# Altium PCB DDS_RIKEN_2014.PcbDoc (part 2 of 3)
Units mm, origin at the board's own origin, x right, y up, seen from the top; angles counter-clockwise.
Board outline 224 x 140 mm, 4 copper layers (TopLayer, Ground, Power, BottomLayer); 165 components, 279 nets, 1109 pads, 427 vias.
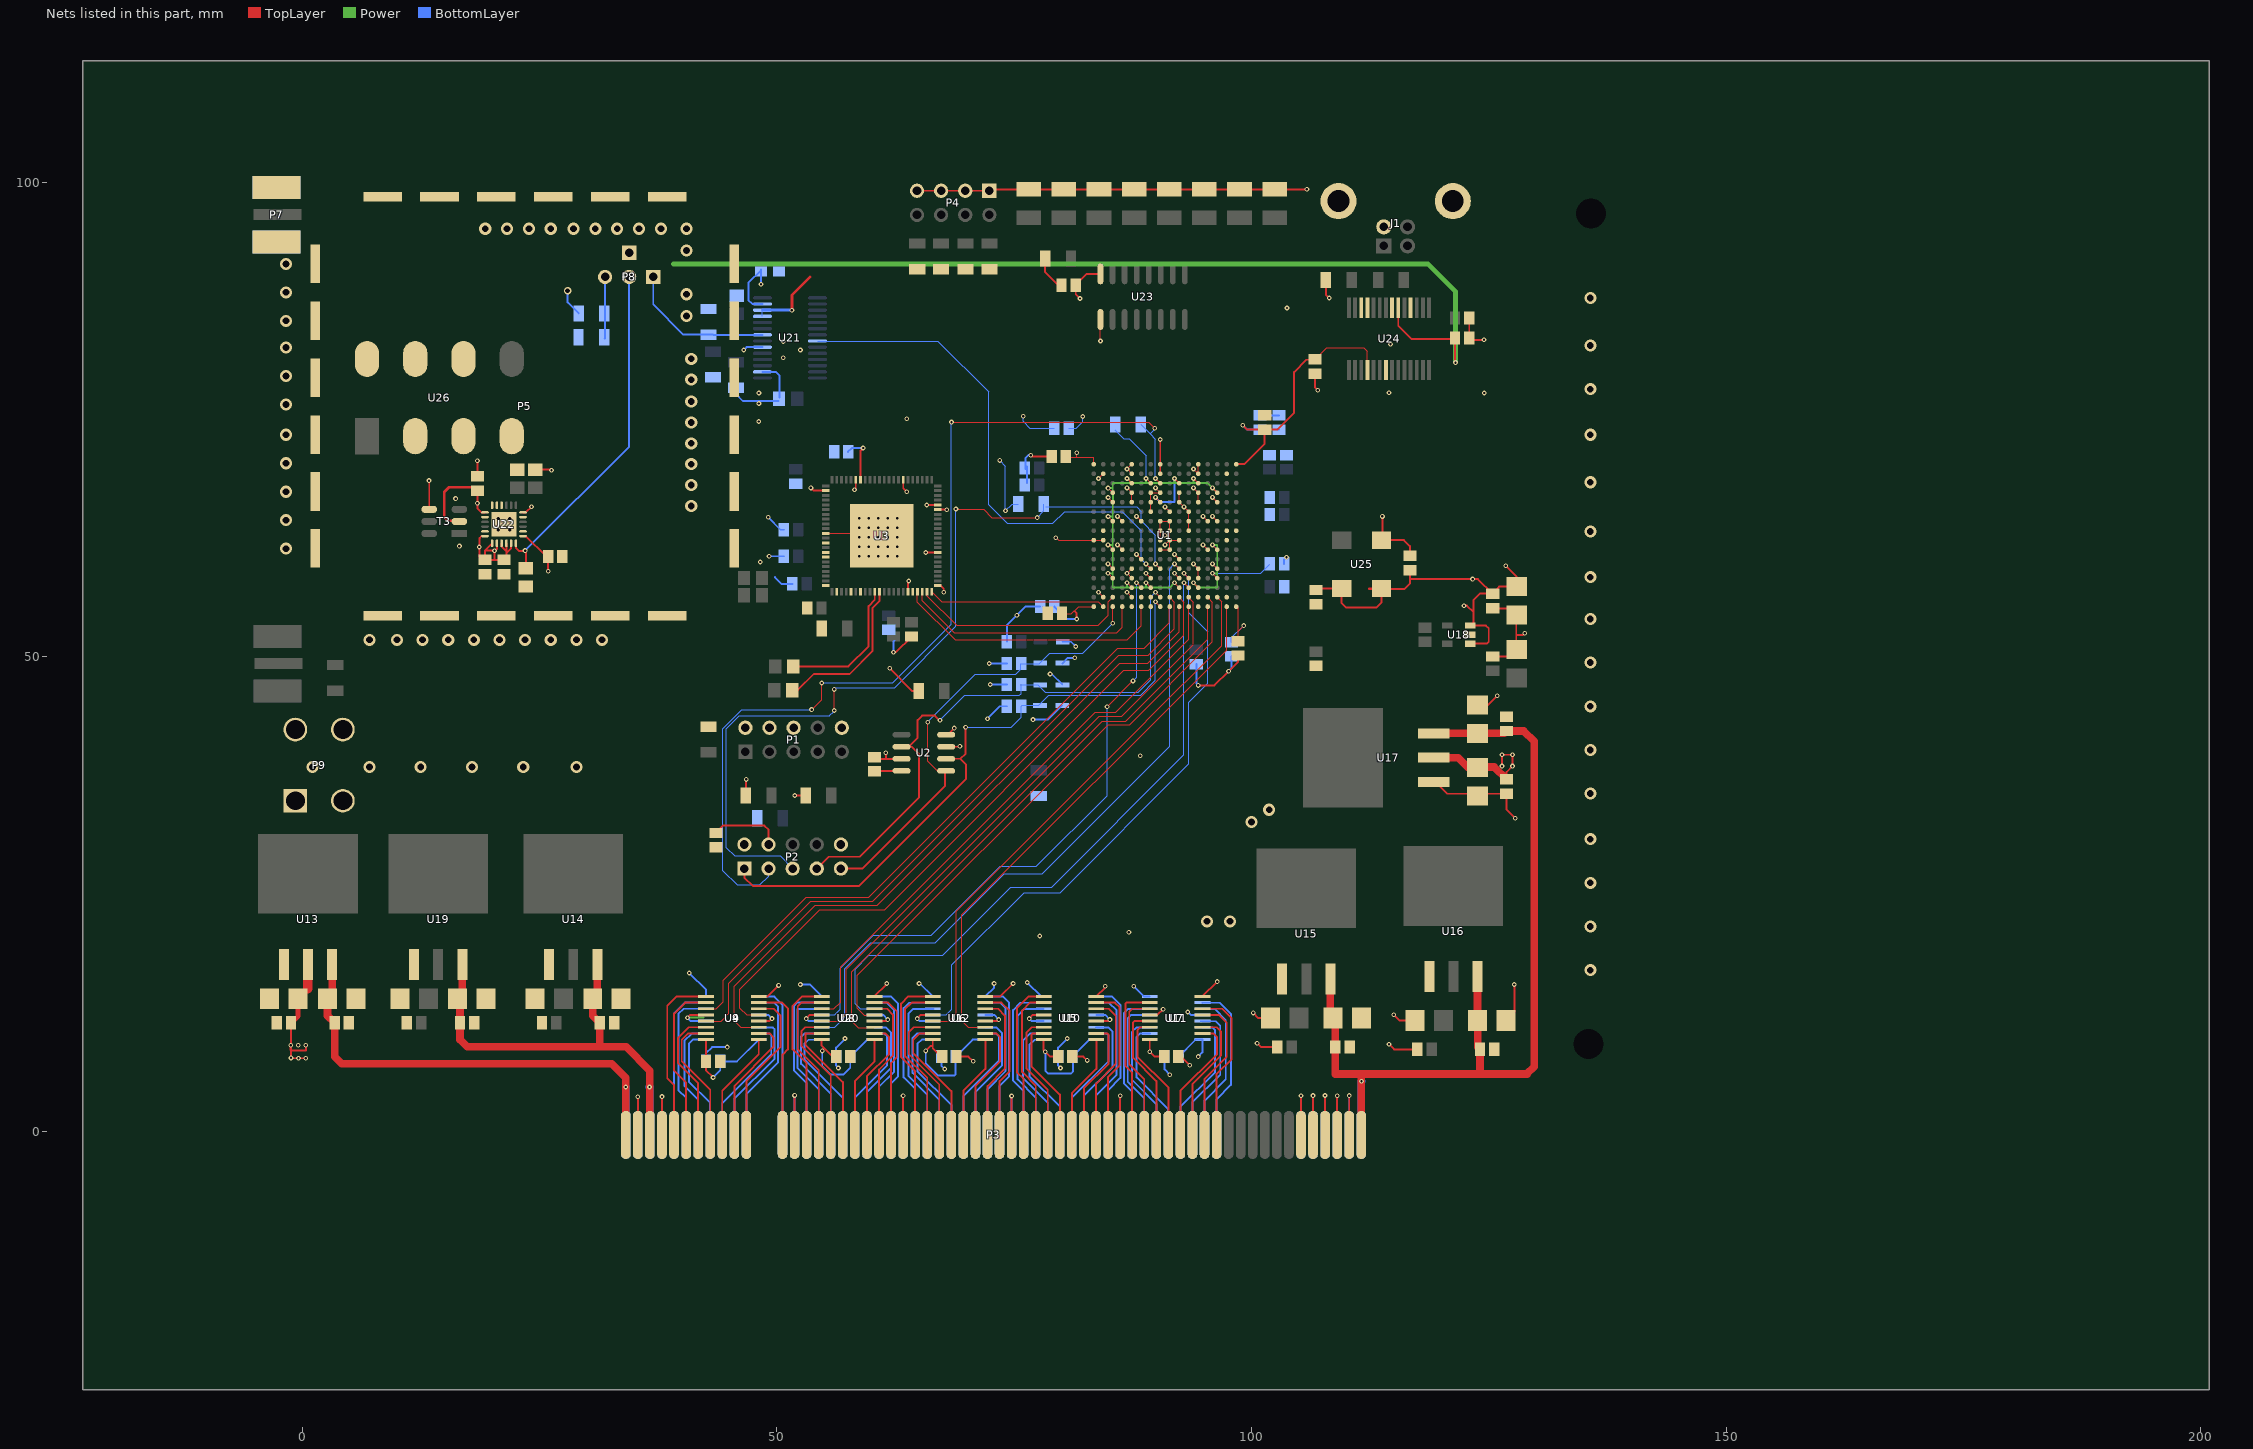
[diagram p4: the nets of this part, all layers, seen from the top]

## Via types
v1: diameter 0.5, hole 0.25, TopLayer to BottomLayer, 240 vias
v2: diameter 0.5, hole 0.25, TopLayer to BottomLayer, tented top, 114 vias
v3: diameter 1.27, hole 0.711, TopLayer to BottomLayer, 68 vias
v4: diameter 0.66, hole 0.33, TopLayer to BottomLayer, tented top, 4 vias
v5: diameter 0.8, hole 0.5, TopLayer to BottomLayer, 1 vias

## Nets (pads, with @x,y where several pads share a name; then routed paths per layer and width w, separated by ;. In a path a pad name is that pad's centre, name@x,y a point inside that pad or via, vN(x,y) a via of type N, cw(c..) or ccw(c..) an arc to the next point about the centre after c; other vN are vias at no path point) (continued)
3.3V_DIG: C1.2 C2.2 C4.2 C5.2 C6.2 C8.2 C9.2 C10.2 C15.1 C16.1 C19.1 C25.1 C30.1 C31.1 C32.1 C33.1 C34.1 C35.1 C36.1 C37.1 C51.1 C54.1 C59.2 C60.2 C67.1 C68.1 C69.1 C80.2 C82.2 C88.1 C91.2 C93.2 D1.1 D2.1 D3.1 D4.1 D5.1 D6.1 D7.1 D8.1 D9.1 D10.1 D11.1 D12.1 P1.4 P1.6 P2.4 P4.1 P4.3 P4.5 P4.7 R1.2 R2.2 R3.2 R5.2 R6.2 U1.A1 U1.A16 U1.C4 U1.C7 U1.C10 U1.C13 U1.E3 U1.E14 U1.G3 U1.G14 U1.H12 U1.K3 U1.K14 U1.M3 U1.M14 U1.P4 U1.P7 U1.P10 U1.P13 U1.T1 U1.T16 U2.3 U2.7 U2.8 U3.16 U3.83 U4.4 U4.12 U4.16 U5.4 U5.12 U5.16 U6.4 U6.12 U6.16 U7.12 U7.16 U8.4 U8.12 U8.16 U9.4 U9.12 U9.16 U10.4 U10.12 U10.16 U11.12 U11.16 U12.4 U12.12 U12.16 U17.2 U18.1 U18.3 U20.4 U20.12 U20.16 U21.27 U23.16 U24.4 U25.1 U25.4 | length 367.9
  TopLayer w0.127: C2.2@79.975,54.525 81.05,54.525 81.8,55.275 U1.A1@83.4,55.275 ; C1.2@80.475,71.025 81.6,71.025 ; v1(81.6,71.475) 81.6,71.025 ; U1.A16@83.4,70.275 83.4,71.025 81.6,71.025 ; v2@84.85,64.82 v2(84.909,64.761) 84.914,64.761 U1.C10@85.4,64.275 ; v2@84.85,67.82 v2(84.909,67.761) 84.914,67.761 U1.C13@85.4,67.275 ; v2(84.9,58.775) U1.C4@85.4,58.275 ; v2(84.9,61.775) U1.C7@85.4,61.275 ; v2(86.9,57.775) U1.E3@87.4,57.275 ; v2(86.9,68.775) U1.E14@87.4,68.275 ; v2(88.9,57.775) U1.G3@89.4,57.275 ; v2(88.9,68.775) U1.G14@89.4,68.275 ; v2(89.9,66.775) U1.H12@90.4,66.275 ; v2(91.9,57.775) U1.K3@92.4,57.275 ; v2(91.9,68.775) U1.K14@92.4,68.275 ; v2(93.9,57.775) U1.M3@94.4,57.275 ; v2(93.9,68.775) U1.M14@94.4,68.275 ; v2(95.9,58.775) U1.P4@96.4,58.275 ; v2(95.9,61.775) U1.P7@96.4,61.275 ; v2(95.9,64.775) U1.P10@96.4,64.275 ; v2(95.9,67.775) U1.P13@96.4,67.275 ; U1.T1@98.4,55.3 98.6,55.1 98.6,52.675 ; C6.2@98.6,51.625 98.6,52.675 ; v1(99.2,53.275) 98.6,52.675 ; C80.2@106.7,81.3 107.95,82.55 111.85,82.55 112.225,82.175 U24.4@112.225,80.2
  TopLayer w0.2: v1(40.6,11.975) 40.889,12.264 U4.12@42.557,12.264 ; U4.16@42.6,9.675 42.55,9.625 C33.1@42.55,7.367 42.55,6.425 v1(43.3,5.675) ; C19.1@43.5,31.375 44.325,32.2 48.7,32.2 49.14,31.76 P2.4@49.14,30.215 ; R5.2@46.75,35.375 46.75,37.025 v1(46.8,37.075) ; U4.4@48.107,11.614 49.239,11.614 v1(49.5,11.875) ; v1(51.9,35.375) R6.2@53.05,35.375 ; v1(53.1,11.875) 53.489,12.264 U8.12@54.749,12.264 ; U8.16@54.7,9.675 54.7,9.075 55,8.775 ; v1(54.8,8.475) 54.8,8.575 55,8.775 ; C30.1@56.266,7.875 55.9,7.875 55,8.775 ; U3.16@58.83,68.641 58.83,71.705 v1(59.1,71.975) ; C15.1@60.275,39.4 60.435,39.24 61.5,39.24 ; U8.4@60.299,11.614 61.539,11.614 v1(61.7,11.775) ; v1(61.5,39.875) 61.5,39.24 ; v1(61.9,48.775) 64.3,46.375 R1.2@64.95,46.375 ; U2.3@63.15,39.24 61.5,39.24 ; P4.7@64.725,99.05 64.75,99.075 P4.7@64.78,99.075 P4.5@67.32,99.075 P4.3@69.86,99.075 P4.1@72.4,99.075 72.425,99.075 72.575,99.225 D11.1@76.45,99.225 ; v1(64.8,11.875) 65.189,12.264 U12.12@66.433,12.264 ; v1(65.7,8.475) 66.2,8.975 66.433,8.975 ; U12.16@66.433,9.664 66.433,8.975 ; U3.83@66.982,65.489 67.886,65.489 v1(67.9,65.475) ; C34.1@67.4,7.775 66.433,8.742 66.433,8.975 ; U2.7@67.85,40.51 69.235,40.51 v1(69.3,40.575) ; U2.8@67.85,41.78 68.005,41.78 v1(68.7,42.475) ; U12.4@71.983,11.614 73.239,11.614 v1(73.4,11.775) ; D11.1@76.05,98.825 D11.1@76.45,99.225 ; v1(76.6,11.875) 76.989,12.264 U5.12@78.117,12.264 ; U5.16@78.1,9.675 78.1,8.575 v1(78.3,8.375) 78.8,7.875 C67.1@79.634,7.875 ; 81.4,54.775 81.6,54.575 v1(81.6,53.975) ; C69.1@81.45,89.125 82.65,90.325 U23.16@84.105,90.325 ; C69.1@81.5,89.125 81.5,88.175 v1(81.95,87.725) ; U5.4@83.667,11.614 84.939,11.614 v1(85.1,11.775) ; U7.12@89.293,12.264 90.089,12.264 v1(90.7,12.875) ; U7.16@89.3,9.675 v1(89.3,8.375) 89.8,7.875 C31.1@90.81,7.875 ; U1.T16@98.4,70.275 99.25,70.275 101.4,72.425 C8.2@101.4,73.925 ; v1(99.1,74.375) 99.55,73.925 C8.2@101.4,73.925 ; C8.2@101.4,73.95 C8.2@101.4,73.925 ; v1(105.85,99.225) D9.1@102.45,99.225 D10.1@98.75,99.225 D12.1@95.05,99.225 D6.1@91.35,99.225 D8.1@87.65,99.225 D7.1@83.95,99.225 D5.1@80.25,99.225 D11.1@76.55,99.225 D11.1@76.45,99.225 ; C16.1@106.7,56.975 106.9,57.175 U25.4@109.509,57.175 109.509,55.641 109.975,55.175 113.15,55.175 113.725,55.75 U25.1@113.725,57.125 ; C80.2@106.7,81.275 105.8,81.275 104.5,79.975 104.5,75.675 102.75,73.925 C8.2@101.4,73.925 ; U25.1@113.625,57.125 U25.1@113.725,57.125 ; U25.1@113.725,57.175 U25.1@113.725,57.125 ; C82.2@116.7,59.125 116.7,58.175 ; U17.2@119.2,39.275 U17.2@119.3,39.375 ; v1(122.4,55.375) 122.7,55.375 123.4,54.675 ; C51.1@122.851,38.324 C51.1@123.83,38.324 ; U18.3@123,53.275 U18.3@123.061,53.275 ; U18.1@123.054,51.368 124.793,51.368 125,51.575 125,52.975 124.7,53.275 U18.3@123.061,53.275 ; U18.3@123.054,53.268 U18.3@123.061,53.275 ; C60.2@125.41,56.624 123.859,58.175 v1(123.3,58.175) 116.7,58.175 ; v1(126.4,38.475) v1(126.4,39.675) v1(127.5,39.675) v1(127.5,38.475) 126.878,37.853 C59.2@126.878,37.066 C59.2@126.878,37.097 ; v1(126.8,59.575) 127.95,58.425 C54.1@127.95,57.374 ; C54.1@127.9,57.375 126.1,57.375 125.4,56.675 124.1,56.675 123.4,55.975 123.4,54.675 ; U25.1@113.725,57.125 116.125,57.125 116.7,57.7 116.7,58.175 ; U18.3@123.061,53.275 123.4,53.614 123.4,54.675
  TopLayer w0.8: U17.2@119.3,39.375 121.8,39.375 C51.1@122.851,38.324 ; C51.1@123.8,38.375 125.6,38.375 C59.2@126.878,37.097
  Power w0.2: v1(40.6,11.975) 42.3,11.975 ; v2(84.9,58.775) 85.4,58.775 ; v2(84.9,61.775) 85.4,61.775 ; v2(84.909,64.761) 85.386,64.761 85.4,64.775 ; v2(84.909,67.761) 85.386,67.761 85.4,67.775 ; v2(86.9,57.775) 86.9,57.275 ; v2(86.9,68.775) 87.4,68.275 ; v2(88.9,57.775) 88.9,57.275 ; v2(88.9,68.775) 88.9,68.275 ; v2(91.9,57.775) 91.4,57.275 88.9,57.275 ; v2(91.9,68.775) 91.9,68.275 ; v2(93.9,57.775) 94.4,57.275 96.4,57.275 96.4,58.775 ; 93.9,68.275 v2(93.9,68.775) ; v2(95.9,58.775) 96.4,58.775 ; v2(95.9,61.775) 96.4,61.775 96.4,58.775 ; 96.4,67.275 95.4,68.275 91.9,68.275 ; 85.4,58.775 85.4,57.275 86.9,57.275 ; 85.4,58.775 85.4,61.775 ; 85.4,61.775 85.4,64.568 85.4,64.775 ; 85.4,64.775 85.4,66.544 85.409,66.554 85.409,66.978 85.4,66.987 85.4,67.775 ; 85.4,67.775 85.4,68.275 87.4,68.275 ; 86.9,57.275 88.9,57.275 ; 87.4,68.275 88.9,68.275 ; 88.9,68.275 91.9,68.275
  BottomLayer w0.127: v1(73.5,70.675) 74.1,70.075 v1(74.1,65.375) 74.8,66.075 R2.2@75.45,66.075 ; C93.2@80.75,74.075 81.575,74.075 82.25,74.75 v1(82.25,75.3) ; R3.2@85.625,73.9 86.575,72.95 87.125,72.95 88.9,71.175 v2(88.9,68.775) ; v2(95.9,58.775) 101,58.775 C4.2@101.95,59.725 ; C5.2@97.9,51.525 97.9,51.975 v1(99.2,53.275)
  BottomLayer w0.2: v1(40.6,11.975) 40.961,11.614 U9.4@42.557,11.614 ; v1(43.3,5.675) 44.05,6.425 C68.1@44.05,7.375 ; C68.1@44.025,7.375 C68.1@44.05,7.375 ; U9.16@48.107,9.664 45.818,7.375 C68.1@44.05,7.375 ; U9.12@48.107,12.264 49.111,12.264 v1(49.5,11.875) ; v1(48.35,89.225) C88.1@48.35,90.775 ; C88.1@48.35,90.725 47.025,89.4 47.025,87.55 47.425,87.15 U21.27@48.5,87.15 ; v1(53.1,11.875) 53.361,11.614 U20.4@54.749,11.614 ; v1(54.8,8.475) 54.8,6.875 55.7,5.975 57,5.975 57.75,6.725 C35.1@57.75,7.875 ; C25.1@57.5,71.575 57.9,71.975 v1(59.1,71.975) ; C35.1@57.725,7.875 59.514,9.664 U20.16@60.299,9.664 ; U20.12@60.299,12.264 61.211,12.264 v1(61.7,11.775) ; v1(64.8,11.875) 65.061,11.614 U6.4@66.433,11.614 ; v1(65.7,8.475) 65.7,7.175 67,5.875 68.7,5.875 68.85,6.025 C36.1@68.85,7.875 ; C36.1@68.8,7.825 C36.1@68.85,7.875 ; U6.16@71.983,9.664 70.639,9.664 C36.1@68.85,7.875 ; U6.12@71.983,12.264 72.911,12.264 v1(73.4,11.775) ; v1(76.6,11.875) 76.861,11.614 U10.4@78.117,11.614 ; v1(77,43.375) 78.575,43.375 D1.1@80.075,44.875 ; v1(78.3,8.375) 78.3,6.375 78.6,6.075 81,6.075 81.2,6.275 C37.1@81.2,7.875 ; v1(78.8,48.175) 78.975,48.175 D2.1@80.075,47.075 ; C9.2@79.25,55.275 80.55,53.975 v1(81.6,53.975) ; D3.1@80.075,49.275 80.675,49.875 v1(81.4,49.875) ; D4.1@80.075,51.575 81,51.575 v1(81.5,51.075) ; C37.1@81.125,7.875 82.914,9.664 U10.16@83.667,9.664 ; U10.12@83.667,12.264 84.611,12.264 v1(85.1,11.775) ; v2(89.9,66.775) 90.4,66.275 91.9,66.275 v2(91.9,68.775) ; C32.1@92.325,7.875 94.114,9.664 U11.16@94.843,9.664 94.843,8.318 v1(94.4,7.875) ; v1(93.3,12.575) 93.611,12.264 U11.12@94.843,12.264 ; v1(99.1,74.375) 99.55,73.925 C10.2@100.9,73.925 C91.2@102.9,73.925
  other v1: 103.75,86.725
  other v3: 95.325,22.125 97.75,22.125 100.025,32.575 101.875,33.875
5V: C38.1 C41.2 C70.2 C72.1 C73.1 C75.1 C79.2 R21.2 T3.2 U13.2 U22.1 U22.6 U22.13 U22.18 U22.19 U22.20 U22.21 U22.22 U22.23 U24.20 | length 151.3
  TopLayer w0.2: v1(-1.2,9.075) -1.2,8.55 -1.162,8.512 ; C41.2@-1.162,11.431 -1.162,8.512 ; C38.1@-0.375,14 0.628,15.003 ; v1(0.4,7.7) v1(-0.375,7.7) -1.125,7.7 v1(-1.162,7.737) -1.162,8.512 ; v1(0.4,9.075) 0.4,8.525 0.387,8.512 -1.162,8.512 ; v1(18.475,66.175) v1@18.5,66.15 ; C72.1@18.5,67.85 v1@18.5,66.15 ; v1(18.675,61.55) v1@18.7,61.55 ; C75.1@18.7,60.5 v1@18.7,61.55 ; C75.1@19.275,60.15 19.325,60.2 20.275,60.2 ; C75.1@19.275,60.2 19.275,61.2 ; U22.18@19.275,62.7 18.9,62.7 18.7,62.5 v1@18.7,61.55 ; U22.13@19.275,65.2 18.9,65.2 18.5,65.6 v1@18.5,66.15 ; U22.19@20.025,61.95 19.275,61.2 ; v1(20.275,61.15) 20.275,60.2 ; U22.20@20.525,61.95 20.525,61.35 20.375,61.2 19.275,61.2 ; U22.21@21.025,61.95 21.025,61.6 21.525,61.1 ; U22.22@21.525,61.95 21.525,61.1 ; 21.575,60.95 22.025,61.4 U22.23@22.025,61.95 ; U22.1@23.275,62.7 23.575,62.7 25.7,60.575 C73.1@25.9,60.575 ; U22.6@23.275,65.2 23.575,65.2 v1(24.175,65.8) ; v1(25.925,59) C73.1@25.925,60.55 ; U24.20@115.475,86.75 115.475,84.875 116.9,83.45 C79.2@121.475,83.45 ; C79.2@121.45,83.575 121.45,81.025 v1(121.5,80.975) ; 20.275,60.2 C70.2@21.275,60.2 21.525,60.45 21.525,61.1
  TopLayer w0.3: T3.2@16.575,64.32 15.38,64.32 14.975,64.725 14.975,67.35 15.475,67.85 C72.1@18.5,67.85
  TopLayer w0.5: C41.2@-1.2,11.35 -0.412,12.138 C38.1@-0.412,13.971
  TopLayer w1: 0.628,15.003 U13.2@0.628,17.573
  Power w0.5: 39.1,91.375 118.6,91.375 121.5,88.475 v1(121.5,80.975)
  BottomLayer w0.2: v5@27.975,88.6 27.975,87.325 R21.2@29.15,86.15
  other v1: -0.4,9.075
  other v5: 27.975,88.55
5V_ANA_BUS: C39.1 C44.2 C56.1 C65.2 P3.A3 P3.B3 U14.3 U19.3 | length 49.6
  TopLayer w0.2: C39.1@30.624,13.971 C39.1@31.108,14.455 ; 31.362,8.891 31.374,8.903
  TopLayer w0.8: C56.1@16.642,13.729 C65.2@16.642,11.431 16.642,9.641 17.392,8.891 31.362,8.891 34.156,8.891 36.645,6.402 P3.B3@36.645,-0.38 ; C56.1@16.884,14.455 U19.3@16.884,17.573 ; C39.1@30.624,13.971 30.624,12.181 C44.2@31.374,11.431 31.374,8.903 ; C39.1@31.108,14.455 U14.3@31.108,17.573
  BottomLayer w0.8: v1(36.6,4.675) 36.645,4.63 P3.A3@36.645,-0.38
5V_DIG_BUS: C43.1 C48.2 C50.1 C52.2 C58.2 C63.1 P3.A62 P3.B62 U15.3 U16.3 U17.3 | length 99.4
  TopLayer w0.2: C43.1@108.324,12.217 C43.1@108.602,11.939 C43.1@108.844,11.697 ; C63.1@123.818,11.709 C63.1@123.842,11.685 ; C52.2@123.842,8.879 C52.2@124.084,8.637 ; 124.072,6.046 124.084,6.058 ; C58.2@126.636,41.928 C58.2@126.878,42.17 ; 128.975,6.025 128.996,6.046
  TopLayer w0.8: C43.1@108.324,12.217 U15.3@108.324,16.049 ; C43.1@108.844,11.697 C48.2@108.844,8.891 108.844,6.046 111.575,6.046 ; P3.B62@111.575,-0.38 111.575,6.046 ; U17.3@119.236,41.928 C50.1@123.83,41.928 C58.2@126.636,41.928 ; C63.1@123.818,11.709 U16.3@123.818,16.303 ; C52.2@123.842,8.879 C63.1@123.842,11.685 ; 124.084,6.058 C52.2@124.084,8.637 ; C58.2@126.878,42.17 128.7,42.17 129.779,41.091 129.779,6.829 128.996,6.046 ; 129.05,6.046 128.996,6.046 ; 111.575,6.046 124.072,6.046 128.996,6.046
  BottomLayer w0.8: P3.A62@111.575,-0.38 111.575,5.25 v1(111.6,5.275)
8V_BUS: C40.2 C46.1 P3.A1 P3.B1 U13.3 | length 52.2
  TopLayer w0.8: C46.1@2.684,13.971 2.684,12.181 C40.2@3.434,11.431 3.434,7.863 4.184,7.113 32.632,7.113 34.105,5.64 P3.B1@34.105,-0.38 ; C46.1@3.168,14.455 U13.3@3.168,17.573
  BottomLayer w0.8: v1(34.1,4.675) 34.105,4.67 P3.A1@34.105,-0.38
AGND: C1.1 C2.1 C3.2 C4.1 C5.1 C6.1 C7.2 C8.1 C9.1 C10.1 C11.2 C12.2 C13.2 C14.2 C15.2 C16.2 C17.1 C18.1 C19.2 C20.2 C21.1 C23.2 C24.1 C25.2 C26.2 C27.2 C28.2 C29.2 C30.2 C31.2 C32.2 C33.2 C34.2 C35.2 C36.2 C37.2 C38.2 C39.2 C40.1 C41.1 C42.2 C43.2 C44.1 C45.1 C46.2 C47.2 C48.1 C49.1 C50.2 C51.2 C52.1 C53.1 C54.2 C55.2 C56.2 C57.2 C58.1 C59.1 C60.1 C61.1 C63.2 C64.2 C65.1 C66.1 C67.2 C68.2 C69.2 C70.1 C71.2 C72.2 C73.2 C74.1 C75.2 C76.2 C77.1 C78.1 C79.1 C80.1 C81.2 C82.1 C87.1 C88.2 C89.2 C90.2 C91.1 C92.1 C93.1 J1.4 J1.5 J1.6 J2.1 P1.2 P1.10 P2.2 P2.10 P3.A2 P3.A4 P3.A15 P3.A24 P3.A33 P3.A42 P3.A57 P3.A58 P3.A59 P3.A60 P3.A61 P3.B2 P3.B4 P3.B15 P3.B24 P3.B33 P3.B42 P3.B57 P3.B58 P3.B59 P3.B60 P3.B61 P5.1 P5.2 P5.3 P5.4 P5.5 P5.6 P5.7 P5.8 P5.9 P5.10 P5.11 P5.12 P5.13 P5.14 P5.15 P5.16 P5.17 P5.18 P5.19 P5.20 P5.21 P5.22 P5.23 P5.24 P7.2 P9.1 P9.2 P9.3 P9.4 R4.2 R7.2 R8.2 R9.1 R10.1 R12.2 R13.1 R14.2 R15.1 R16.2 R17.2 R18.2 R19.1 R22.1 T3.4 U1.A8 U1.B2 U1.B8 U1.B9 U1.B15 U1.C5 U1.C12 U1.D7 U1.D10 U1.E1 U1.E2 U1.E4 U1.E5 U1.E12 U1.E13 U1.E15 U1.E16 U1.F6 U1.F10 U1.G4 U1.G11 U1.G12 U1.G13 U1.H7 U1.H8 U1.H9 U1.H10 U1.H13 U1.H15 U1.H16 U1.J7 U1.J8 U1.J9 U1.J10 U1.J11 U1.K4 U1.K6 U1.K8 U1.K12 U1.K13 U1.L9 U1.L10 U1.L11 U1.M1 U1.M2 U1.M4 U1.M5 U1.M12 U1.M13 U1.M15 U1.M16 U1.N7 U1.N10 U1.P5 U1.P12 U1.R2 U1.R8 U1.R9 U1.R15 U1.T9 U2.4 U3.7 U3.17 U3.24 U3.33 U3.35 U3.37 U3.38 U3.44 U3.46 U3.49 U3.51 U3.61 U3.62 U3.67 U3.74 U3.84 U3.89 U4.8 U5.8 U6.8 U7.8 U8.8 U9.8 U10.8 U11.8 U12.8 U13.1 U14.1 U15.1 U16.1 U17.1 U18.2 U19.1 U20.8 U21.16 U21.20 U21.25 U21.26 U22.2 U22.5 U22.10 U22.11 U22.12 U22.14 U22.17 U22.25 U23.1 U24.7 U24.18 U24.21 U24.25 U24.26 U25.2 U26.2 U26.3 U26.4 U26.5 U26.6 U26.7 | length 326.3
  TopLayer w0.127: U3.33@55.178,62.989 U3.89@58.086,62.989 ; v1@79.4,62.575 v1(79.4,62.538) 79.437,62.538 79.7,62.275 U1.A8@83.4,62.275 U1.B8@84.4,62.275 ; v2(83.9,56.775) U1.B2@84.4,56.275 ; v2(83.9,68.775) U1.B15@84.4,69.275 ; v1(84.105,83.255) U23.1@84.105,85.525 ; v2@84.82,66.85 v2(84.909,66.761) 84.914,66.761 U1.C12@85.4,66.275 ; v2(84.9,59.775) U1.C5@85.4,59.275 ; v2(85.9,61.775) U1.D7@86.4,61.275 ; v2(85.9,64.775) U1.D10@86.4,64.275 ; v2(86.9,56.775) U1.E2@87.4,56.275 ; v2(86.9,67.775) U1.E13@87.4,67.275 U1.E12@87.4,66.275 ; U1.E4@87.4,58.275 v2(86.9,58.775) U1.E5@87.4,59.275 ; U1.E15@87.4,69.275 v2(86.9,69.775) U1.E16@87.4,70.275 ; v2(87.9,60.775) U1.F6@88.4,60.275 ; v2(87.9,64.775) U1.F10@88.4,64.275 ; v2(88.9,58.775) U1.G4@89.4,58.275 ; U1.G11@89.4,65.275 U1.G13@89.4,67.275 U1.H13@90.4,67.275 v2(89.9,67.775) ; U1.H7@90.4,61.275 U1.J7@91.4,61.275 U1.J8@91.4,62.275 ; U1.H8@90.4,62.275 U1.H9@90.4,63.275 U1.H10@90.4,64.275 U1.J10@91.4,64.275 U1.J9@91.4,63.275 U1.J8@91.4,62.275 ; v2(90.9,61.775) U1.J8@91.4,62.275 ; v2(90.9,62.775) U1.J8@91.4,62.275 ; v2(90.9,65.775) U1.J11@91.4,65.275 ; v2(91.9,58.775) U1.K4@92.4,58.275 ; v2(91.9,60.775) U1.K6@92.4,60.275 ; U1.K8@92.4,62.275 U1.J8@91.4,62.275 ; U1.K13@92.4,67.275 U1.K12@92.4,66.275 v2(92.9,65.775) U1.L11@93.4,65.275 U1.L10@93.4,64.275 U1.L9@93.4,63.275 ; v2(93.9,59.775) U1.M5@94.4,59.275 U1.M4@94.4,58.275 ; v2(93.9,67.775) U1.M13@94.4,67.275 U1.M12@94.4,66.275 ; v2(93.9,69.775) U1.M15@94.4,69.275 U1.M16@94.4,70.275 ; v2(94.9,61.775) U1.N7@95.4,61.275 ; v2(94.9,64.775) U1.N10@95.4,64.275 ; v2(95.9,59.775) U1.P5@96.4,59.275 ; v2(95.9,66.775) U1.P12@96.4,66.275
  TopLayer w0.2: v1(13.375,68.55) 13.4,68.525 T3.4@13.4,65.59 ; C72.2@18.475,69 v1(18.475,70.65) ; C77.1@24.575,69.7 26.225,69.7 v1(26.275,69.65) ; P3.B2@35.375,-0.38 v1(35.375,3.65) ; P3.B4@37.915,-0.38 v1(37.915,3.66) ; U4.8@48.107,14.214 49.039,14.214 v1(50.2,15.375) ; P3.B15@51.885,-0.38 v1(51.885,3.79) ; v1(53.6,67.775) 53.886,67.489 U3.24@55.178,67.489 ; v1(58.2,67.575) 58.33,67.705 U3.17@58.33,68.641 ; C15.2@60.275,37.8 60.445,37.97 U2.4@63.15,37.97 ; U8.8@60.299,14.214 61.6,15.515 v1(61.6,15.575) ; v1(62.3,50.475) 62.55,50.475 C23.2@64.2,52.125 ; P3.B24@63.315,-0.38 v1(63.315,3.76) ; U3.7@63.33,68.641 63.33,67.745 v1(63.7,67.375) ; U3.61@63.83,56.837 63.83,57.905 v1(63.9,57.975) ; v1(65.7,60.975) 65.714,60.989 U3.74@66.982,60.989 ; v1(65.8,65.975) 65.814,65.989 U3.84@66.982,65.989 ; U3.67@66.982,57.489 66.996,57.475 67.3,57.475 67.6,57.175 v1(67.6,56.775) ; C34.2@68.942,7.875 70.2,7.875 v1(70.7,7.375) ; U12.8@71.983,14.214 73.539,14.214 v1(74.9,15.575) ; P3.B33@74.745,-0.38 v1(74.745,3.73) ; v1@76.9,71.075 77.25,71.075 C1.1@78.95,71.075 ; R9.1@78.3,91.925 78.25,91.925 78.25,90.525 79.65,89.125 C69.2@80,89.125 ; C67.2@81.134,7.875 82.3,7.875 v1(82.7,7.475) ; U5.8@83.667,14.214 84.6,15.147 v1(84.6,15.275) ; P3.B42@86.175,-0.38 v1(86.175,3.75) ; U1.H15@90.4,69.275 v1(90.4,72.875) ; C31.2@92.31,7.875 92.6,7.875 v1(93.5,6.975) ; v1(94.4,46.975) 96.1,46.975 v1(97.6,48.475) 98.6,49.475 C6.1@98.6,50.125 ; U7.8@94.843,14.214 96.4,15.771 v1(96.4,15.775) ; v1(100.2,12.475) 100.736,11.939 C47.2@101.998,11.939 ; v1(100.6,9.275) 100.984,8.891 C49.1@102.748,8.891 ; P3.B57@105.225,-0.38 v1(105.225,3.75) ; P3.B58@106.495,-0.38 v1(106.495,3.77) ; C80.1@106.7,79.825 106.7,78.375 v1(107,78.075) ; v1(107.75,3.775) v1@107.765,3.775 ; P3.B59@107.765,-0.38 v1@107.765,3.775 ; R10.1@107.85,89.675 107.85,88.125 v1(108.2,87.775) ; P3.B60@109.035,-0.38 v1(109.035,3.74) ; P3.B61@110.305,-0.38 v1(110.305,3.77) ; U25.2@113.675,62.275 116.075,62.275 116.7,61.65 C82.1@116.7,60.625 ; U25.2@113.7,62.255 113.8,62.355 v1(113.8,64.775) ; v1(114.5,9.175) 115.038,8.637 C53.1@117.48,8.637 ; v1(115,12.275) 115.59,11.685 C64.2@117.238,11.685 ; U17.1@119.4,36.775 120.609,35.566 C59.1@126.878,35.566 126.878,33.897 v1(127.8,32.975) ; C81.2@122.95,85.675 122.95,83.425 123,83.375 v1(124.5,83.375) ; C50.2@123.83,44.928 124.953,44.928 v1(125.9,45.875) ; C60.1@125.4,55.075 127.2,55.075 127.9,54.375 127.9,52.275 ; C61.1@125.41,50.02 127.045,50.02 127.9,50.875 127.9,52.275 ; C63.2@126.842,11.685 127.7,12.543 v1(127.7,15.475) ; v1(128.8,52.475) 128.6,52.275 127.9,52.275 ; v1@107.765,3.775 107.8,3.775 107.8,3.805 107.765,3.84 v1@107.765,3.775
  TopLayer w0.3: v1(51.6,86.5) 51.6,88.1 53.5,90
  BottomLayer w0.127: U21.25@48.5,85.85 U21.26@48.5,86.45 ; v1(75.975,75.325) 75.975,74.775 76.675,74.075 C93.1@79.25,74.075
  BottomLayer w0.2: P3.A2@35.375,-0.38 v1(35.375,3.65) v1@35.4,3.675 ; v1@37.9,3.675 v1(37.915,3.66) P3.A4@37.915,-0.38 ; v1(40.8,16.675) 42.557,14.918 U9.8@42.557,14.214 ; C68.2@42.55,7.375 42.55,8.225 43.2,8.875 v1(44.8,8.875) ; R13.1@45.7,78.325 45.7,77.675 46.45,76.925 C74.1@50.2,76.925 ; v1(46.525,82.3) 46.825,82.6 U21.20@48.5,82.6 ; U21.16@48.5,80 49.875,80 50.3,79.575 C74.1@50.3,77.275 ; v1(49.1,64.675) 50.4,63.375 C29.2@50.75,63.375 ; v1(49.2,60.575) C28.2@50.75,60.575 ; 49.8,58.375 50.5,57.675 C27.2@51.65,57.675 ; P3.A15@51.885,-0.38 51.885,3.76 v1@51.9,3.775 ; v1(52.5,15.475) 53.488,15.475 U20.8@54.749,14.214 ; v1(56.5,6.675) 56.25,6.925 C35.2@56.25,7.875 56.25,8.825 v1(57.2,9.775) ; v1(62.3,50.475) 62.3,51.575 62.4,51.675 ; v1@63.3,3.775 v1(63.315,3.76) P3.A24@63.315,-0.38 ; v1(65,15.575) 65.072,15.575 U6.8@66.433,14.214 ; C36.2@67.35,7.875 67.35,6.925 v1(67.7,6.575) ; v1(72.2,43.475) 73.5,44.775 C11.2@74.25,44.775 ; v1(72.4,49.275) C13.2@74.25,49.275 ; v1(72.5,47.075) C12.2@74.25,47.075 ; C14.2@74.25,51.575 74.25,53.325 v1(75.3,54.375) 76.2,55.275 C9.1@77.75,55.275 ; P3.A33@74.745,-0.38 74.745,3.72 v1@74.8,3.775 ; C92.1@76.2,69.775 76.2,70.925 76.5,71.225 v1(76.75,71.225) ; C17.1@76.35,68.275 C92.1@76.35,70.025 ; v1(76.4,15.675) 77.861,14.214 U10.8@78.117,14.214 ; v1(79.9,6.675) 79.65,6.925 C37.2@79.65,7.875 79.65,8.825 v1(80.6,9.775) ; P3.A42@86.175,-0.38 v1(86.175,3.75) v1@86.2,3.775 ; v1(87.6,15.275) 88.661,14.214 U11.8@89.293,14.214 ; C32.2@90.85,7.875 90.85,6.525 v1(91.4,5.975) ; C20.2@94.2,49.225 94.2,47.175 v1(94.4,46.975) ; v1(97.6,48.475) 97.9,48.775 C5.1@97.9,50.025 ; C10.1@100.95,75.425 C91.1@102.9,75.425 ; C4.1@103.45,59.775 103.45,60.225 v1(103.7,60.475) ; v1@105.2,3.775 v1(105.225,3.75) P3.A57@105.225,-0.38 ; P3.A58@106.495,-0.38 v1(106.495,3.77) v1@106.5,3.775 ; P3.A59@107.765,-0.38 107.765,3.74 v1@107.8,3.775 ; v1@109,3.775 v1(109.035,3.74) P3.A60@109.035,-0.38 ; v1@110.3,3.775 v1(110.305,3.77) P3.A61@110.305,-0.38
  BottomLayer w0.3: U21.26@48.5,86.5 v1(51.6,86.5)
  other v1: 77.7,20.575 87.1,20.975 88.3,39.575 48.275,59.975 58.7,60.575 59.7,60.575 60.7,60.575 61.7,60.575 62.7,60.575 58.7,61.575 59.7,61.575 60.7,61.575 61.7,61.575 62.7,61.575 16.575,61.65 58.7,62.575 59.7,62.575 60.7,62.575 61.7,62.575 62.7,62.575 58.7,63.575 59.7,63.575 60.7,63.575 61.7,63.575 62.7,63.575 58.7,64.575 59.7,64.575 60.7,64.575 61.7,64.575 62.7,64.575 16.175,66.65 48.1,74.775 63.7,75.05 48.125,76.675 48.125,77.775 124.525,77.775 114.5,77.8 50.7,81.5 52.5,82.3 114.65,82.9 50.7,83.2
  other v3: 135.7,16.975 135.7,21.575 135.7,26.175 135.7,30.775 135.7,35.575 1.1,38.375 7.1,38.375 12.5,38.375 17.9,38.375 23.3,38.375 28.9,38.375 135.7,40.175 135.7,44.775 135.7,49.375 7.1,51.775 10,51.775 12.7,51.775 15.4,51.775 18.1,51.775 20.8,51.775 23.5,51.775 26.2,51.775 28.9,51.775 31.6,51.775 135.7,53.975 135.7,58.375 -1.7,61.375 135.7,63.175 -1.7,64.375 41,65.875 -1.7,67.375 41,68.075 135.7,68.375 41,70.275 -1.7,70.375 41,72.475 -1.7,73.375 135.7,73.375 41,74.675 -1.7,76.575 41,76.875 135.7,78.175 41,79.175 -1.7,79.575 41,81.375 -1.7,82.575 135.7,82.775 -1.7,85.375 40.5,85.875 135.7,87.775 40.5,88.175 -1.7,88.375 -1.7,91.375 40.5,92.775 19.3,95.075 21.6,95.075 23.9,95.075 26.2,95.075 28.6,95.075 30.9,95.075 33.2,95.075 35.5,95.075 37.8,95.075 40.5,95.075
  other v4: 20.675,63.35 21.875,63.35 20.675,64.55 21.875,64.55
AS_CONF_DONE: P2.3 R3.1 U1.H14 | length 102.1
  TopLayer w0.127: v1@53.65,44.375 54.75,45.475 v1(54.75,47.225) ; v1(68.409,74.711) 68.445,74.675 89.2,74.675 v1(89.825,74.05) ; v2(89.9,68.775) U1.H14@90.4,68.275
  BottomLayer w0.127: P2.3@49.14,27.675 49.14,26.865 48.225,25.95 45.85,25.95 44.325,27.475 44.325,42.425 46.325,44.425 v1(53.675,44.425) ; v1(54.75,47.225) 54.75,47.25 62.25,47.25 68.409,53.409 v1(68.409,74.711) ; R3.1@88.35,74.475 89.337,73.488 ; v1(89.825,74.05) 89.825,73.977 89.337,73.488 ; v2(89.9,68.775) 89.9,71.525 ; 89.9,71.55 89.9,71.525 ; 89.337,73.488 89.9,72.925 89.9,71.525
AS_DATA: C12.1 D2.2 P2.7 U1.H2 U2.2 | length 62.2
  TopLayer w0.127: v2(89.9,56.775) U1.H2@90.4,56.275
  TopLayer w0.2: P2.7@54.223,27.672 55.475,28.925 58.75,28.925 65,35.175 65,39.725 64.215,40.51 U2.2@63.885,40.51 ; U2.2@63.15,40.51 U2.2@63.885,40.51 ; v1@67.175,43.275 66.662,43.788 65.313,43.788 64.85,43.325 64.85,41.475 U2.2@63.885,40.51
  BottomLayer w0.127: v1(67.2,43.3) 69.825,45.925 70.859,45.925 ; 70.725,45.925 70.859,45.925 ; C12.1@75.675,47.05 C12.1@75.75,47.05 ; C12.1@75.75,47.075 C12.1@75.75,47.05 ; 86.5,46.25 86.585,46.25 ; v2(89.9,56.775) 89.4,56.275 89.4,47.572 88.078,46.25 86.585,46.25 ; 70.859,45.925 75.575,45.925 75.75,46.1 C12.1@75.75,47.05 ; C12.1@75.75,47.05 77.5,47.05 78.3,46.25 86.585,46.25
AS_DCLK: C11.1 D1.2 P2.1 U1.H1 U2.6 | length 68.9
  TopLayer w0.127: v2(89.9,55.775) U1.H1@90.4,55.275
  TopLayer w0.2: P2.1@46.6,27.675 46.6,26.725 47.475,25.85 58.675,25.85 69.925,37.1 69.925,38.65 69.325,39.25 U2.6@67.75,39.25 ; 69.35,39.25 69.9,39.8 v1(69.9,42.575)
  BottomLayer w0.127: v1(69.9,42.575) 74.725,42.575 75.75,43.6 C11.1@75.75,44.775 ; C11.1@75.75,44.8 75.85,44.9 77.6,44.9 78.65,45.95 84.784,45.95 ; 84.5,45.95 84.784,45.95 ; 89.9,53.575 89.9,53.66 ; v2(89.9,55.775) 89.9,53.66 ; 84.784,45.95 88.35,45.95 89.9,47.5 89.9,53.66
AS_NCONFIG: P2.5 R2.1 U1.H5 | length 90.8
  TopLayer w0.127: v1(56.05,44.325) 56.075,44.35 v1(56.075,46.55) ; v1(68.875,65.55) 68.9,65.525 71.8,65.525 72.675,64.65 v1(77.45,64.65) ; v2(89.9,59.775) U1.H5@90.4,59.275
  BottomLayer w0.127: P2.5@51.68,27.675 50.35,29.005 45.57,29.005 44.7,29.875 44.7,42.411 46.064,43.775 55.558,43.775 ; 55.6,43.775 55.558,43.775 ; v1(56.05,44.325) 56.05,44.267 55.558,43.775 ; v1(56.075,46.55) 56.075,46.75 62.425,46.75 68.875,53.2 v1(68.875,65.55) ; v1(77.45,64.65) 78.15,65.35 R2.1@78.15,66.075 ; R2.1@78.325,65.775 81.259,65.775 ; 81.15,65.775 81.259,65.775 ; v2(89.9,59.775) 89.9,62.8 88.4,64.3 88.4,65.275 87.9,65.775 81.259,65.775
ASDI: C13.1 D3.2 P2.9 U1.C1 U2.5 | length 48.6
  TopLayer w0.127: v1(65.9,43.1) 65.9,38.975 66.905,37.97 U2.5@67.85,37.97 ; v1(85.4,53.525) U1.C1@85.4,55.275
  TopLayer w0.2: P2.9@56.76,27.675 59.025,27.675 67.725,36.375 U2.5@67.725,37.95
  BottomLayer w0.127: v1(65.9,43.1) 65.9,43.125 70.925,48.15 75.175,48.15 75.7,48.675 75.7,49.275 77.65,49.275 78.75,50.375 82.25,50.375 v1(85.4,53.525)
BUS0_N: P3.B9 U4.1 | length 11.6
  TopLayer w0.2: P3.B9@44.265,-0.38 44.265,4.268 48.107,8.11 U4.1@48.107,9.664
BUS0_P: P3.B10 U4.2 | length 13.7
  TopLayer w0.2: P3.B10@45.535,-0.38 45.535,4.776 49.65,8.891 49.65,9.907 49.243,10.314 U4.2@48.107,10.314
BUS1_N: P3.B14 U4.7 | length 16.9
  TopLayer w0.2: U4.7@48.107,13.564 50.565,13.564 51.174,12.955 51.174,8.637 50.615,8.078 P3.B14@50.615,-0.38
BUS1_P: P3.B11 U4.6 | length 16.7
  TopLayer w0.2: P3.B11@46.805,-0.38 46.805,5.284 50.412,8.891 50.412,12.193 49.691,12.914 U4.6@48.107,12.914
BUS2_N: P3.B5 U4.9 | length 18.4
  TopLayer w0.2: P3.B5@39.185,-0.38 39.185,4.878 38.474,5.589 38.474,13.209 39.479,14.214 U4.9@42.557,14.214
BUS2_P: P3.B6 U4.10 | length 17.1
  TopLayer w0.2: P3.B6@40.455,-0.38 40.455,5.132 39.198,6.389 39.198,12.409 40.353,13.564 U4.10@42.557,13.564
BUS3_N: P3.B8 U4.15 | length 14.1
  TopLayer w0.2: U4.15@42.557,10.314 40.659,10.314 39.998,9.653 39.998,7.367 42.995,4.37 P3.B8@42.995,-0.38
BUS3_P: P3.B7 U4.14 | length 14.5
  TopLayer w0.2: P3.B7@41.725,-0.38 41.725,5.074 39.598,7.201 39.598,9.819 40.743,10.964 U4.14@42.557,10.964
BUS4_N: P3.B20 U8.1 | length 10.9
  TopLayer w0.2: P3.B20@58.235,-0.38 58.235,5.284 60.299,7.348 U8.1@60.299,9.664
BUS4_P: P3.B21 U8.2 | length 13
  TopLayer w0.2: P3.B21@59.505,-0.38 59.505,5.792 61.842,8.129 61.842,9.907 61.435,10.314 U8.2@60.299,10.314
BUS5_N: P3.B23 U8.7 | length 16
  TopLayer w0.2: U8.7@60.299,13.564 61.741,13.564 62.642,12.663 62.642,7.798 62.045,7.201 P3.B23@62.045,-0.38
BUS5_P: P3.B22 U8.6 | length 15.5
  TopLayer w0.2: U8.6@60.299,12.914 61.629,12.914 62.242,12.301 62.242,7.963 60.775,6.497 P3.B22@60.775,-0.38
BUS6_N: P3.B16 U8.9 | length 17.7
  TopLayer w0.2: P3.B16@53.155,-0.38 53.155,7.164 51.682,8.637 51.682,13.209 52.687,14.214 U8.9@54.749,14.214
BUS6_P: P3.B17 U8.10 | length 17.2
  TopLayer w0.2: P3.B17@54.425,-0.38 54.425,6.459 52.219,8.666 52.219,13.18 52.603,13.564 U8.10@54.749,13.564
BUS7_N: P3.B19 U8.15 | length 14.1
  TopLayer w0.2: U8.15@54.749,10.314 53.019,10.314 53.019,9.136 56.965,5.189 P3.B19@56.965,-0.38
BUS7_P: P3.B18 U8.14 | length 14.5
  TopLayer w0.2: U8.14@54.749,10.964 52.993,10.964 52.619,10.59 52.619,8.97 55.695,5.894 P3.B18@55.695,-0.38
BUS8_N: P3.B29 U12.1 | length 11
  TopLayer w0.2: P3.B29@69.665,-0.38 69.665,4.268 71.983,6.586 U12.1@71.983,9.664
BUS8_P: P3.B30 U12.2 | length 13.1
  TopLayer w0.2: P3.B30@70.935,-0.38 70.935,4.776 73.526,7.367 73.526,9.907 73.119,10.314 U12.2@71.983,10.314
BUS9_N: P3.B32 U12.7 | length 16.4
  TopLayer w0.2: U12.7@71.983,13.564 73.679,13.564 74.542,12.701 74.542,6.351 73.475,5.284 P3.B32@73.475,-0.38
BUS9_P: P3.B31 U12.6 | length 15.7
  TopLayer w0.2: U12.6@71.983,12.914 73.313,12.914 74.034,12.193 74.034,6.605 72.205,4.776 P3.B31@72.205,-0.38
BUS10_N: P3.B25 U12.9 | length 18.1
  TopLayer w0.2: P3.B25@64.585,-0.38 64.585,6.332 63.112,7.805 63.112,13.463 63.863,14.214 U12.9@66.433,14.214
BUS10_P: P3.B26 U12.10 | length 17.4
  TopLayer w0.2: P3.B26@65.855,-0.38 65.855,5.64 63.512,7.983 63.512,12.847 64.229,13.564 U12.10@66.433,13.564
BUS11_N: P3.B28 U12.15 | length 14
  TopLayer w0.2: U12.15@66.433,10.314 65.043,10.314 64.382,9.653 64.382,8.244 68.395,4.231 P3.B28@68.395,-0.38
BUS11_P: P3.B27 U12.14 | length 14.9
  TopLayer w0.2: U12.14@66.433,10.964 64.423,10.964 63.912,10.453 63.912,8.149 67.125,4.935 P3.B27@67.125,-0.38
BUS12_N: P3.B38 U5.1 | length 11.1
  TopLayer w0.2: P3.B38@81.095,-0.38 81.095,4.014 83.667,6.586 U5.1@83.667,9.664
BUS12_P: P3.B39 U5.2 | length 13
  TopLayer w0.2: P3.B39@82.365,-0.38 82.365,4.522 84.956,7.113 84.956,10.161 84.803,10.314 U5.2@83.667,10.314
BUS13_N: P3.B41 U5.7 | length 16.6
  TopLayer w0.2: U5.7@83.667,13.564 85.617,13.564 86.118,13.063 86.118,6.947 84.905,5.735 P3.B41@84.905,-0.38
BUS13_P: P3.B40 U5.6 | length 15.8
  TopLayer w0.2: P3.B40@83.635,-0.38 83.635,5.03 85.718,7.113 85.718,12.193 84.997,12.914 U5.6@83.667,12.914
BUS14_N: P3.B34 U5.9 | length 17
  TopLayer w0.2: P3.B34@76.015,-0.38 76.015,5.532 75.304,6.243 75.304,12.955 76.563,14.214 U5.9@78.117,14.214
BUS14_P: P3.B35 U5.10 | length 16.3
  TopLayer w0.2: P3.B35@77.285,-0.38 77.285,4.827 75.841,6.272 75.841,12.73 76.675,13.564 U5.10@78.117,13.564
BUS15_N: P3.B37 U5.15 | length 13.1
  TopLayer w0.2: U5.15@78.117,10.314 76.981,10.314 76.828,10.161 76.828,6.859 79.825,3.862 P3.B37@79.825,-0.38
BUS15_P: P3.B36 U5.14 | length 13.7
  TopLayer w0.2: U5.14@78.117,10.964 76.869,10.964 76.32,10.415 76.32,6.605 78.555,4.37 P3.B36@78.555,-0.38
BUS16_N: P3.A8 U9.1 | length 12.1
  BottomLayer w0.2: U9.1@42.557,9.664 41.164,9.664 40.75,9.25 40.75,5.25 42.975,3.025 P3.A8@42.975,0.1
BUS16_P: P3.A7 U9.2 | length 13.2
  BottomLayer w0.2: P3.A7@41.725,-0.38 41.725,3.35 40.275,4.8 40.275,9.525 41.05,10.3 U9.2@42.675,10.3
BUS17_N: P3.A5 U9.7 | length 17.3
  BottomLayer w0.2: P3.A5@39.2,-1.075 39.2,12.425 40.339,13.564 U9.7@42.557,13.564
BUS17_P: P3.A6 U9.6 | length 15.9
  BottomLayer w0.2: P3.A6@40.45,-0.1 40.45,3.525 39.65,4.325 39.65,12.375 40.189,12.914 U9.6@42.557,12.914
BUS18_N: P3.A14 U9.9 | length 16.6
  BottomLayer w0.2: U9.9@48.05,14.2 49.75,14.2 50.6,13.35 50.6,-0.365 P3.A14@50.615,-0.38
BUS18_P: P3.A11 U9.10 | length 17.1
  BottomLayer w0.2: P3.A11@46.805,-0.38 46.805,3.905 50.125,7.225 50.125,13.175 49.75,13.55 U9.10@48.075,13.55
BUS19_N: P3.A9 U9.15 | length 14.1
  BottomLayer w0.2: P3.A9@44.265,-0.38 44.265,2.965 49.425,8.125 49.425,10.125 49.25,10.3 U9.15@48.05,10.3
BUS19_P: P3.A10 U9.14 | length 14.6
  BottomLayer w0.2: P3.A10@45.535,-0.38 45.535,3.41 49.775,7.65 49.775,10.75 49.6,10.925 U9.14@48.1,10.925
BUS20_N: P3.A19 U20.1 | length 13.3
  BottomLayer w0.2: U20.1@54.725,9.65 53.35,9.65 52.925,9.225 52.925,7.6 56.965,3.56 P3.A19@56.965,-0.38
BUS20_P: P3.A18 U20.2 | length 14
  BottomLayer w0.2: U20.2@54.75,10.3 52.9,10.3 52.575,9.975 52.575,7.1 55.695,3.98 P3.A18@55.695,-0.38
BUS21_N: P3.A16 U20.7 | length 17.3
  BottomLayer w0.2: P3.A16@53.155,-0.38 53.155,5.07 51.825,6.4 51.825,13.25 52.15,13.575 U20.7@54.8,13.575
BUS21_P: P3.A17 U20.6 | length 16.8
  BottomLayer w0.2: P3.A17@54.425,-0.38 54.425,4.425 52.2,6.65 52.2,12.875 52.225,12.9 U20.6@54.775,12.9
BUS22_N: P3.A23 U20.9 | length 16.9
  BottomLayer w0.2: U20.9@60.325,14.2 62.05,14.2 62.775,13.475 62.775,5.775 62.045,5.045 P3.A23@62.045,-0.38
BUS22_P: P3.A22 U20.10 | length 16.2
  BottomLayer w0.2: U20.10@60.325,13.525 60.375,13.575 61.55,13.575 62.375,12.75 62.375,6.3 60.775,4.7 P3.A22@60.775,-0.38
BUS23_N: P3.A20 U20.15 | length 13.2
  BottomLayer w0.2: P3.A20@58.235,-0.38 58.235,3.56 61.625,6.95 61.625,10 61.325,10.3 U20.15@60.3,10.3
BUS23_P: P3.A21 U20.14 | length 13.7
  BottomLayer w0.2: P3.A21@59.505,-0.38 59.505,4.105 62.025,6.625 62.025,10.425 61.5,10.95 U20.14@60.35,10.95
BUS24_N: P3.A28 U6.1 | length 12.9
  BottomLayer w0.2: U6.1@66.4,9.625 66.35,9.675 65.275,9.675 64.825,9.225 64.825,6.35 68.395,2.78 P3.A28@68.395,-0.38
BUS24_P: P3.A27 U6.2 | length 13.7
  BottomLayer w0.2: U6.2@66.425,10.275 66.4,10.3 64.775,10.3 64.325,9.85 64.325,6.15 67.125,3.35 P3.A27@67.125,-0.38
BUS25_N: P3.A25 U6.7 | length 17.1
  BottomLayer w0.2: P3.A25@64.585,-0.38 64.585,4.465 63.375,5.675 63.375,12.975 63.95,13.55 66.375,13.55 U6.7@66.4,13.525
BUS25_P: P3.A26 U6.6 | length 16.4
  BottomLayer w0.2: P3.A26@65.855,-0.38 65.855,3.87 63.875,5.85 63.875,12.375 64.4,12.9 U6.6@66.5,12.9
BUS26_N: P3.A32 U6.9 | length 18.9
  BottomLayer w0.2: U6.9@71.925,14.2 73.85,14.2 74.45,13.6 74.45,5.775 73.475,4.8 P3.A32@73.475,-0.38 ; U6.9@71.983,14.214 72.9,15.131 v1(72.9,15.575)
BUS26_P: P3.A31 U6.10 | length 16.6
  BottomLayer w0.2: U6.10@71.925,13.5 71.975,13.55 73.525,13.55 74.1,12.975 74.1,6.35 72.205,4.455 P3.A31@72.205,-0.38
BUS27_N: P3.A29 U6.15 | length 13.5
  BottomLayer w0.2: P3.A29@69.665,-0.38 69.665,3.69 73.4,7.425 73.4,10 73.1,10.3 U6.15@72,10.3
BUS27_P: P3.A30 U6.14 | length 13.9
  BottomLayer w0.2: P3.A30@70.935,-0.38 70.935,4.135 73.75,6.95 73.75,10.325 73.125,10.95 U6.14@72.025,10.95
BUS28_N: P3.A37 U10.1 | length 12.5
  BottomLayer w0.2: U10.1@78.075,9.65 77.175,9.65 76.625,9.1 76.625,5.825 79.825,2.625 P3.A37@79.825,-0.38
BUS28_P: P3.A36 U10.2 | length 13.6
  BottomLayer w0.2: U10.2@78.175,10.325 76.725,10.325 75.925,9.525 75.925,5.65 78.555,3.02 P3.A36@78.555,-0.38
BUS29_N: P3.A34 U10.7 | length 17.2
  BottomLayer w0.2: P3.A34@76.015,-0.38 76.015,4.235 74.9,5.35 74.9,12.775 75.675,13.55 U10.7@78.125,13.55
BUS29_P: P3.A35 U10.6 | length 16.4
  BottomLayer w0.2: P3.A35@77.285,-0.38 77.285,3.565 75.375,5.475 75.375,12.175 76.1,12.9 U10.6@78.1,12.9
BUS30_N: P3.A41 U10.9 | length 17.2
  BottomLayer w0.2: U10.9@83.6,14.175 83.625,14.2 85.325,14.2 86.2,13.325 86.2,5.625 84.905,4.33 P3.A41@84.905,-0.38
BUS30_P: P3.A40 U10.10 | length 16.6
  BottomLayer w0.2: U10.10@83.575,13.55 85,13.55 85.8,12.75 85.8,5.975 83.635,3.81 P3.A40@83.635,-0.38
BUS31_N: P3.A38 U10.15 | length 13.5
  BottomLayer w0.2: P3.A38@81.095,-0.38 81.095,3.52 84.95,7.375 84.95,10.1 84.75,10.3 83.6,10.3 U10.15@83.575,10.275
BUS31_P: P3.A39 U10.14 | length 14
  BottomLayer w0.2: P3.A39@82.365,-0.38 82.365,3.74 85.375,6.75 85.375,10.475 84.9,10.95 U10.14@83.65,10.95
BUS32_N: P3.B48 U7.3 | length 14.3
  TopLayer w0.2: P3.B48@93.795,-0.38 93.795,4.973 96.786,7.963 96.786,10.523 96.345,10.964 U7.3@94.843,10.964
BUS32_P: P3.B47 U7.2 | length 13.6
  TopLayer w0.2: P3.B47@92.525,-0.38 92.525,4.268 96.386,8.129 96.386,9.907 95.979,10.314 U7.2@94.843,10.314
BUS33_N: P3.B49 U7.5 | length 15.7
  TopLayer w0.2: U7.5@94.843,12.264 96.569,12.264 97.402,11.431 97.402,7.875 95.065,5.538 P3.B49@95.065,-0.38
BUS33_P: P3.B50 U7.6 | length 16.4
  TopLayer w0.2: U7.6@94.843,12.914 96.935,12.914 97.91,11.939 97.91,7.621 96.335,6.046 P3.B50@96.335,-0.38
BUS34_N: P3.B44 U7.11 | length 15.9
  TopLayer w0.2: P3.B44@88.715,-0.38 88.715,5.481 87.134,7.063 87.134,12.593 87.455,12.914 U7.11@89.293,12.914
BUS34_P: P3.B43 U7.10 | length 16.7
  TopLayer w0.2: P3.B43@87.445,-0.38 87.445,6.186 86.734,6.897 86.734,13.463 86.835,13.564 U7.10@89.293,13.564
BUS35_N: P3.B45 U7.13 | length 14.7
  TopLayer w0.2: U7.13@89.293,11.614 87.679,11.614 87.534,11.469 87.534,7.735 89.985,5.284 P3.B45@89.985,-0.38
BUS35_P: P3.B46 U7.14 | length 13.8
  TopLayer w0.2: U7.14@89.293,10.964 88.299,10.964 88.004,10.669 88.004,7.875 91.255,4.624 P3.B46@91.255,-0.38
BUS36_N: P3.A45 U11.3 | length 14
  BottomLayer w0.2: U11.3@89.35,10.95 87.9,10.95 87.425,10.475 87.425,5.425 89.985,2.865 P3.A45@89.985,-0.38
BUS36_P: P3.A46 U11.2 | length 13.3
  BottomLayer w0.2: U11.2@89.325,10.3 88.25,10.3 87.9,9.95 87.9,5.675 91.225,2.35 91.225,-0.35 P3.A46@91.255,-0.38
BUS37_N: P3.A44 U11.5 | length 15.5
  BottomLayer w0.2: P3.A44@88.715,-0.38 88.715,3.51 86.975,5.25 86.975,11.925 87.325,12.275 U11.5@89.35,12.275
BUS37_P: P3.A43 U11.6 | length 16.1
  BottomLayer w0.2: P3.A43@87.445,-0.38 87.445,4.18 86.575,5.05 86.575,12.45 87.025,12.9 89.3,12.9 U11.6@89.325,12.925
BUS38_N: P3.A49 U11.11 | length 15.9
  BottomLayer w0.2: U11.11@94.9,12.9 96.125,12.9 97.3,11.725 97.3,5.47 95.065,3.235 P3.A49@95.065,-0.38
BUS38_P: P3.A50 U11.10 | length 16.9
  BottomLayer w0.2: U11.10@94.825,13.525 94.85,13.55 96.675,13.55 97.85,12.375 97.85,4.9 96.335,3.385 P3.A50@96.335,-0.38
BUS39_N: P3.A48 U11.13 | length 15
  BottomLayer w0.2: P3.A48@93.795,-0.38 93.795,3.045 96.725,5.975 96.725,11.1 96.225,11.6 94.7,11.6 U11.13@94.675,11.575
BUS39_P: P3.A47 U11.14 | length 14
  BottomLayer w0.2: P3.A47@92.525,-0.38 92.525,2.575 96.175,6.225 96.175,10.675 95.9,10.95 94.85,10.95 U11.14@94.825,10.925
DAC_GAIN_CONTROL: P8.1 R15.2 U21.22 | length 15.7
  BottomLayer w0.127: R15.2@43.3,83.925 R15.2@43.325,83.9
  BottomLayer w0.2: P8.1@36.925,89.925 37,89.85 37,87.1 40.175,83.925 R15.2@42.8,83.925 R15.2@43.3,83.925 ; R15.2@43.325,83.9 U21.22@48.5,83.9
DDS_CLK+: C83.1 U3.54 | length 14.8
  TopLayer w0.2: C83.1@51.75,48.975 57.55,48.975 59.675,51.1 59.675,55.325 60.325,55.975 U3.54@60.325,56.8
DDS_CLK-: C84.1 U3.55 | length 16.7
  TopLayer w0.2: C84.1@51.65,46.5 52.225,46.5 53.9,48.175 57.675,48.175 60.1,50.6 60.1,55.15 60.83,55.88 U3.55@60.83,56.837
FIXED_1_4V: P8.3 R21.1 R22.2 | length 5.7
  BottomLayer w0.127: R22.2@31.85,83.475 R22.2@31.9,83.525
  BottomLayer w0.2: R22.2@31.9,83.525 31.9,89.2
GAIN_CONTROL: C76.1 P8.2 U22.24 | length 36.1
  TopLayer w0.2: U22.24@22.525,61.975 22.525,61.475 22.85,61.15 v1@23.5,61.15 ; v1(23.5,61.175) 23.575,61.1 C76.1@23.575,59.3
  BottomLayer w0.2: v1@23.525,61.2 34.45,72.125 34.45,89.225
IOB1_0: U1.B1 U3.66 | length 18.7
  TopLayer w0.127: U3.66@66.33,56.837 67.392,55.775 83.875,55.775 U1.B1@84.375,55.275
IOB1_1: U1.C2 U3.65 | length 23.3
  TopLayer w0.127: U3.65@65.83,56.837 65.825,56.832 65.825,56.436 68.961,53.3 83.85,53.3 84.9,54.35 84.9,55.775 U1.C2@85.375,56.25
IOB1_2: U1.F3 U20.5 | length 66.3
  TopLayer w0.127: v1(84.8,44.725) v1(87.525,47.45) ; v2(87.9,57.775) U1.F3@88.4,57.275
  BottomLayer w0.127: U20.5@54.982,12.264 56.089,12.264 56.7,12.875 56.7,17.175 56.854,17.329 60.175,20.65 66.275,20.65 73.525,27.9 77.35,27.9 84.8,35.35 v1(84.8,44.725) ; v1(87.525,47.45) 87.9,47.825 v2(87.9,57.775)
IOB1_3: U1.D1 U3.64 | length 25.8
  TopLayer w0.127: U3.64@65.33,56.837 65.33,55.895 68.7,52.525 85.8,52.525 86.375,53.1 U1.D1@86.375,55.3
IOB1_4: U1.G5 U21.8 | length 55
  TopLayer w0.127: v2(88.9,59.775) U1.G5@89.4,59.275
  BottomLayer w0.127: U21.8@54.3,83.25 66.975,83.25 72.325,77.9 72.325,76.65 ; 72.325,74.15 72.325,73.961 ; 72.325,76.7 72.325,76.65 ; v2(88.9,59.775) 88.4,60.275 88.4,63.275 86.4,65.275 80.325,65.275 79.1,64.05 74.275,64.05 72.325,66 72.325,73.961 ; 72.325,73.961 72.325,76.65
IOB1_5: U1.F2
IOB1_6: U1.F1 U3.63 | length 29
  TopLayer w0.127: U3.63@64.83,56.837 64.83,55.745 68.8,51.775 86.925,51.775 88.4,53.25 U1.F1@88.4,55.3
IOB1_7: U1.G2
IOB1_8: U1.G1
IOB2_0: U1.J2 U4.13 | length 71.8
  TopLayer w0.127: U4.13@42.557,11.614 44.164,11.614 44.975,12.425 44.975,15.6 53.613,24.238 60.113,24.238 86.025,50.15 89.125,50.15 91.9,52.925 91.9,55.75 U1.J2@91.4,56.25
IOB2_1: U1.J1 U4.11 | length 68.7
  TopLayer w0.127: U4.11@42.557,12.914 43.639,12.914 44.375,13.65 44.375,15.9 53.125,24.65 59.7,24.65 85.95,50.9 88.7,50.9 91.375,53.575 U1.J1@91.375,55.275
IOB2_2: U1.K2 U4.5 | length 70.8
  TopLayer w0.127: U4.5@48.107,12.264 46.836,12.264 46.125,12.975 46.125,14.95 54.525,23.35 61.375,23.35 86.575,48.55 88.285,48.55 ; 88.375,48.55 88.285,48.55 ; U1.K2@92.4,56.25 92.9,55.75 92.9,52.275 89.175,48.55 88.285,48.55
IOB2_3: U1.K1 U4.3 | length 71.4
  TopLayer w0.127: U4.3@48.107,10.964 46.211,10.964 45.55,11.625 45.55,15.3 54.056,23.806 60.606,23.806 86.125,49.325 89.075,49.325 92.4,52.65 U1.K1@92.4,55.25
IOB2_4: U1.L2 U8.13 | length 63.3
  TopLayer w0.127: U8.13@54.932,11.589 56.539,11.589 57.35,12.4 57.35,17.075 84,43.725 86.35,43.725 93.9,51.275 93.9,55.725 U1.L2@93.375,56.25
IOB2_5: U1.L1 U8.11 | length 60.2
  TopLayer w0.127: U8.11@54.932,12.889 56.014,12.889 56.75,13.625 56.75,17.35 83.55,44.15 85.7,44.15 93.4,51.85 U1.L1@93.4,55.275
IOB2_6: U1.L3 U20.11 | length 69.3
  TopLayer w0.127: v2(92.9,57.775) U1.L3@93.4,57.275
  BottomLayer w0.127: U20.11@60.299,12.914 58.786,12.914 58.25,13.45 58.25,17.1 59.675,18.525 67.475,18.525 74.65,25.7 78.95,25.7 92.9,39.65 92.9,43.61 ; 92.9,43.5 92.9,43.61 ; 92.9,53.875 92.9,54.06 ; v2(92.9,57.775) 92.9,54.06 ; 92.9,43.61 92.9,54.06
  BottomLayer w0.2: U20.11@60.299,12.914 U20.11@60.532,12.914
IOB2_7: U1.N2 U8.5 | length 62.6
  TopLayer w0.127: U8.5@60.482,12.239 59.211,12.239 58.5,12.95 58.5,16.425 84.9,42.825 87.175,42.825 95.9,51.55 95.9,55.75 U1.N2@95.4,56.25
IOB2_8: U1.N1 U8.3 | length 63.5
  TopLayer w0.127: U8.3@60.482,10.939 58.586,10.939 57.925,11.6 57.925,16.825 84.3,43.2 86.775,43.2 95.4,51.825 U1.N1@95.4,55.275
IOB2_9: U1.K5 U20.3 | length 72.1
  TopLayer w0.127: v2(91.9,59.775) U1.K5@92.4,59.275
  BottomLayer w0.127: U20.3@54.982,10.964 56.139,10.964 57.175,12 57.175,17.15 59.9,19.875 66.7,19.875 73.95,27.125 77.95,27.125 91.4,40.575 91.4,43.635 ; 91.4,43.525 91.4,43.635 ; 91.4,53.85 91.4,54.06 ; v2(91.9,59.775) 91.4,59.275 91.4,54.06 ; 91.4,43.635 91.4,54.06
IOB2_10: U1.L4 U6.5 | length 63.7
  TopLayer w0.127: v2(92.9,58.775) U1.L4@93.4,58.275
  BottomLayer w0.127: U6.5@66.732,12.264 67.839,12.264 68.45,12.875 68.45,16.6 ; 68.45,17.175 68.45,16.6 ; v2(92.9,58.775) 93.4,58.275 93.4,54.646 95.4,52.646 95.4,47.175 93.4,45.175 93.4,43.76 ; 93.4,43.65 93.4,43.76 ; 68.45,16.6 68.45,17.55 76.05,25.15 79.85,25.15 93.4,38.7 93.4,43.76
IOB2_11: U1.R1 U12.3 | length 58
  TopLayer w0.127: U12.3@72.057,10.964 U12.3@71.983,10.964 70.161,10.964 69.5,11.625 69.5,22.8 97.4,50.7 U1.R1@97.4,55.25
IOB2_12: U1.P2 U12.13 | length 58.4
  TopLayer w0.127: U12.13@66.507,11.614 68.114,11.614 68.925,12.425 68.925,23.175 88.95,43.2 88.95,43.225 96.9,51.175 96.9,55.775 U1.P2@96.4,56.275